# Altium PCB Pulse flashlight.PcbDoc
Units mil, origin at the board's own origin, x right, y up, seen from the top; angles counter-clockwise.
Board outline 1125 x 1005 mil, 2 copper layers (Top Layer, Bottom Layer); 13 components, 9 nets, 30 pads, 4 vias.
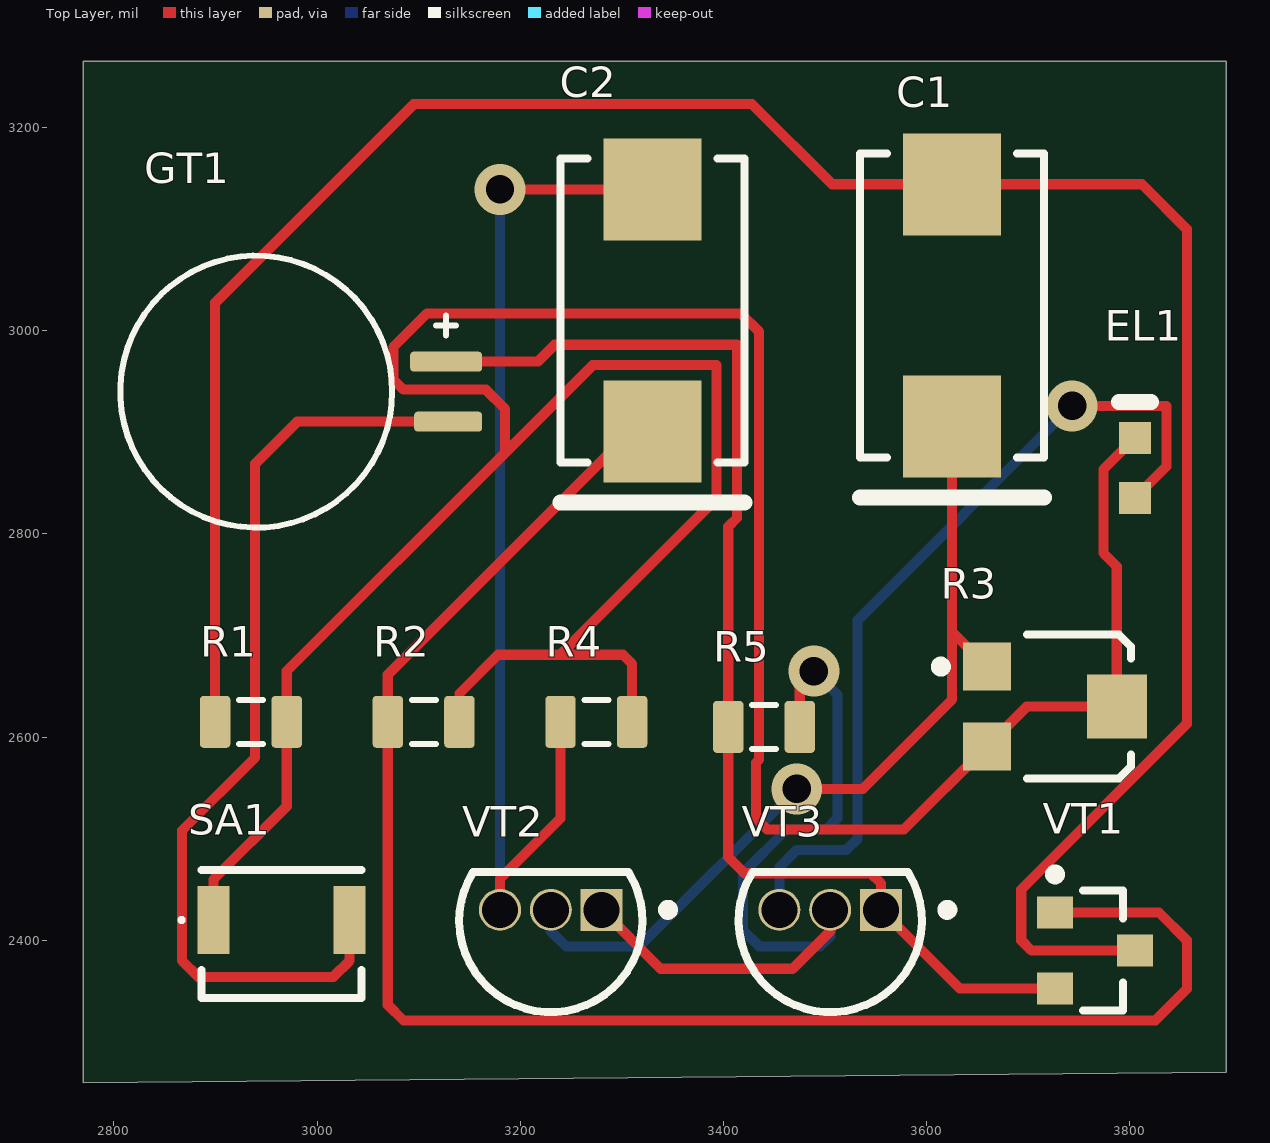
[diagram p0: Top Layer view]
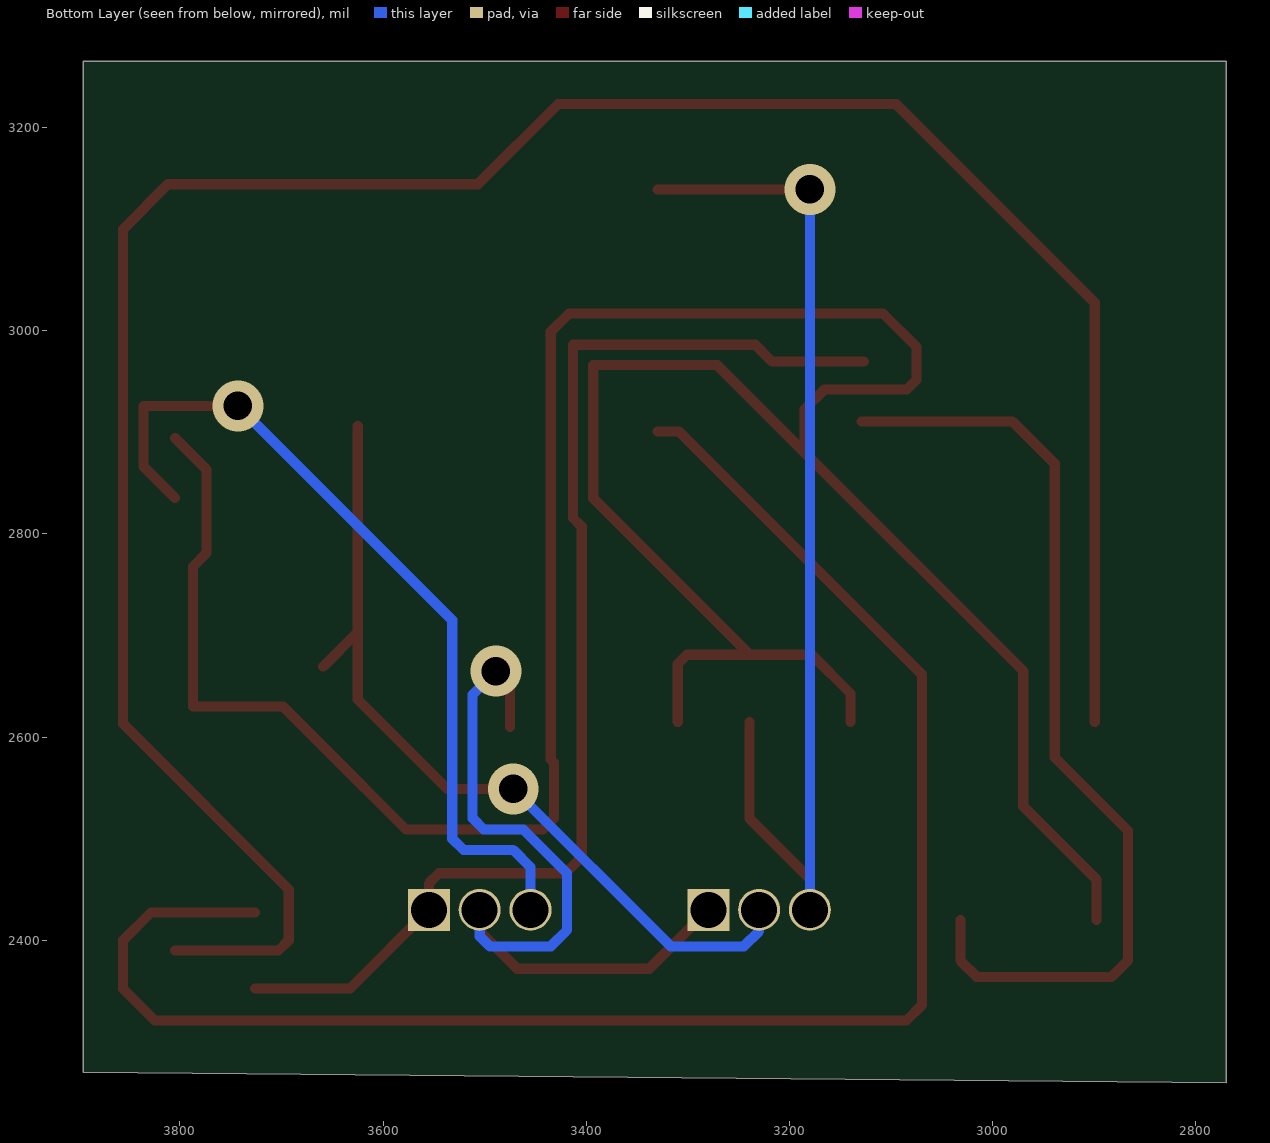
[diagram p1: Bottom Layer view, seen from below]
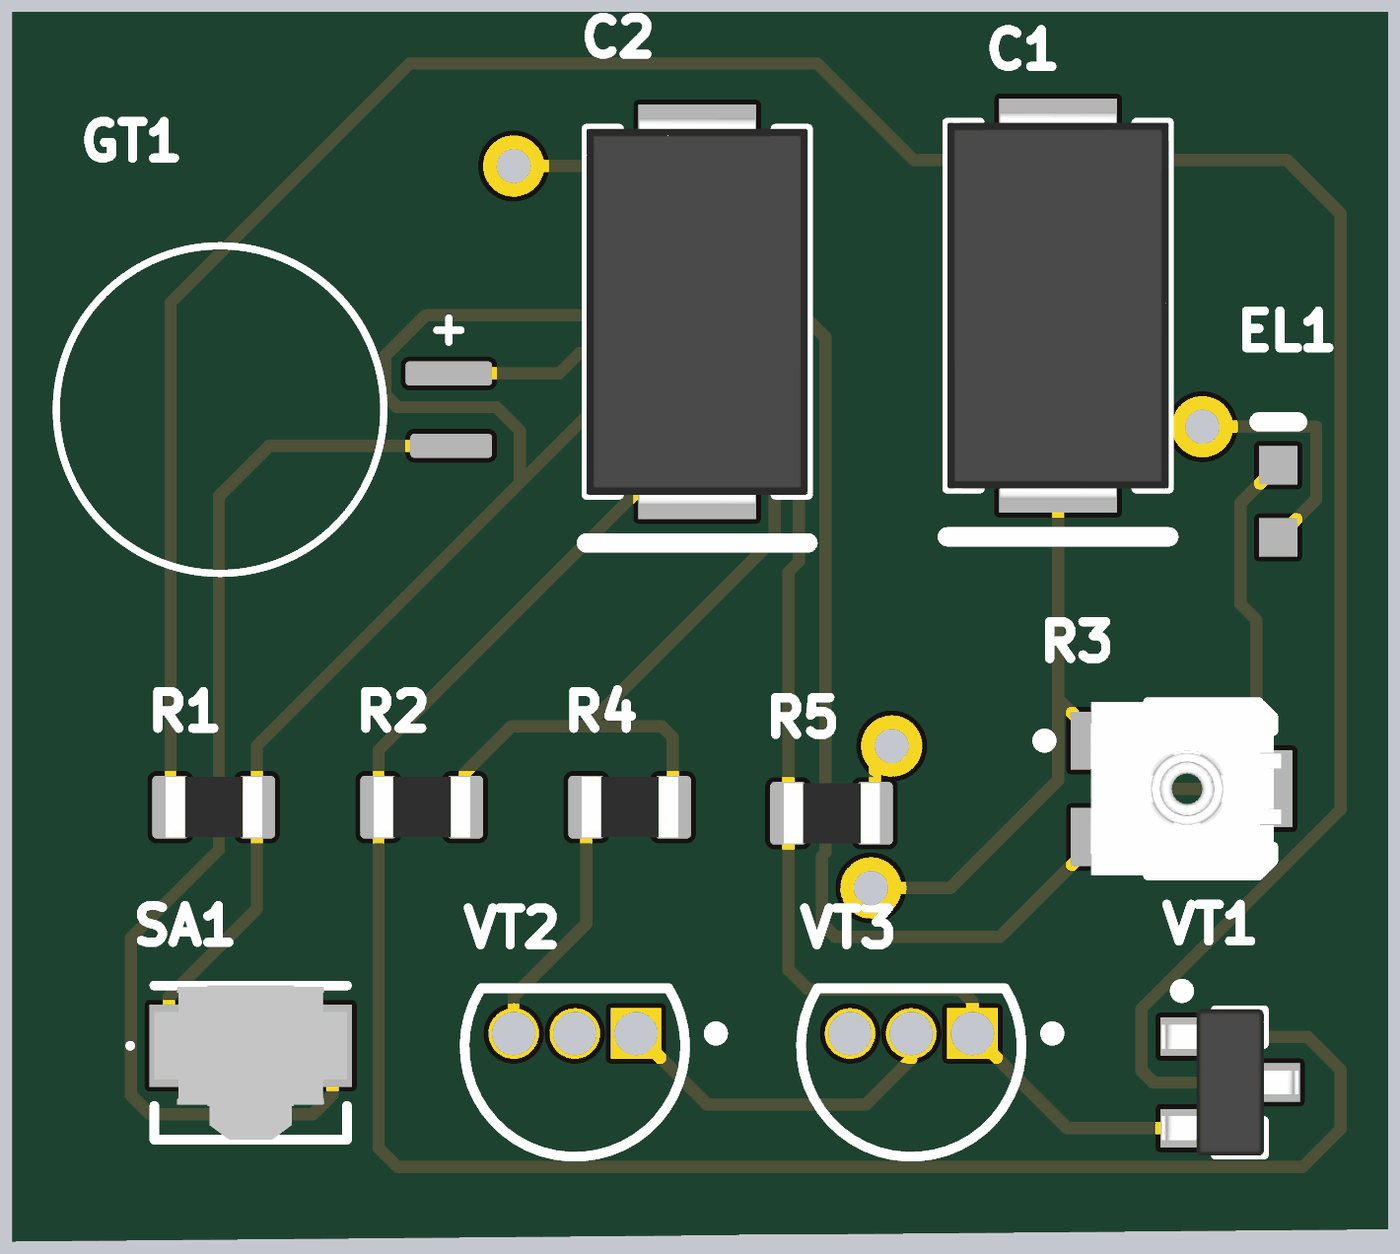
[diagram p2: 3D render of the assembled board from above, using the file's embedded part models]

## Layer stack, top to bottom
Top Solder: solder mask 0.4, Solder Resist, Dk 3.5
Top Layer: signal copper 1.4
Dielectric 1: dielectric 12.6, FR-4, Dk 4.8
Bottom Layer: signal copper 1.4
Bottom Solder: solder mask 0.4, Solder Resist, Dk 3.5

## Board outline
3895,2270 3895,3265 2770,3265 2770,2260

## Design rules (kind name [scope] priority, off if disabled: settings)
Clearance [All] p1: gap=10 ignorepadtopadclearanceinfootprint=FALSE except(0: Arc-Hole Track-Hole SMDPad-Hole THPad-Hole Via-Hole Fill-Hole Poly-Hole Region-Hole Text-Hole)
PolygonConnect [All] p1: connectstyle=Relief reliefconductorwidth=10 reliefentries=4 polygonreliefangle="90 Angle" airgapwidth=10
RoutingVias [All] p1: holewidth=28 width=50 viastyle="Through Hole" minholewidth=28 minwidth=50 maxholewidth=28 maxwidth=50
SolderMaskExpansion [All] p1: expansion=4 istentingtop=FALSE
Width [All] p1: maxlimit=10 minlimit=10 preferedwidth=10
30 further rules are at their usual default settings.

## Components (designator, comment, footprint, x,y, rotation, side; value= is the part's Value field where it differs from the comment)
C1 "293D107X9010D2TE3" VISH-7343-31_N 3625,3025 r90 top value="50mk x 6B"
C2 "293D107X9010D2TE3" VISH-7343-31_N 3330,3020 r90 top value="10mk x 6B"
EL1 "HSMG-C190" AVAG-HSMX-C190_V 3805,2865 r90 top (schematic designator HL1)
GT1 "4.5B" SEIK-MS621FE-FL11E-2_V 2940,2940 r0 top
R1 "1KR5J" RESC0805(2012)_L 2935,2615 r0 top value=1.5k
R2 "1KR5J" RESC0805(2012)_L 3105,2615 r0 top value=20k
R3 "TC33X-2-103E" BOUR-TC33X-2_V 3730,2630 r0 top value=150K
R4 "1KR5J" RESC0805(2012)_L 3275,2615 r0 top value=1.5k
R5 "1KR5J" RESC0805(2012)_L 3440,2610 r0 top value=160k
SA1 "B3U-3000P" OMRON-B3U-3000P_V 2965,2420 r0 top
VT1 "МП141А" ONSC-SOT-23-3-318-08_V 3765.63,2390 r0 top
VT2 "МП141А" UNIC-TO-92-3 3230,2430 r0 top
VT3 "МП26Б" UNIC-TO-92-3 3505,2430 r0 top

## Footprints (in the part's own frame and the unit in brackets; to place one, negate y for a bottom-side part, rotate by r counter-clockwise, add the part's x,y. Pads: shape width x height; smd on the part's side, far side on the other; paste and mask are expansions set on the pad)
AVAG-HSMX-C190_V [mm] "SMD, 2-Leads, Body 1.6x0.8mm, Height 0.9mm"
  rect 0.8x0.8 smd: 1(-0.75,0) 2(0.75,0)
  silkscreen extent 1.65,-0.4 1.65,0.4, body extent -0.8,-0.4 0.8,0.4, height 0.9
BOUR-TC33X-2_V [mm] "SMD, 3-Leads, Body 3.8x3.6mm"
  rect 1.2x1.2 smd: 1(-1.8,1) 3(-1.8,-1)
  rect 1.5x1.6 smd: 2(1.45,0)
  silkscreen extent -3.07,-1.8 1.8,1.8, body extent -2,-1.8 1.96,1.8, height 1.15
OMRON-B3U-3000P_V [mm] "SMD, 2-Leads, Body 4x3.2mm"
  rect 0.8x1.7 smd: 1(-1.7,0) 2(1.7,0)
  silkscreen extent -2.55,-1.95 2,1.25, body extent -2,-1.95 2,1.25, height 1.2
ONSC-SOT-23-3-318-08_V [mm] "SOT23, 3-Leads, Body 3.04x1.4mm, Pitch 0.95mm"
  rect 0.9x0.8 smd: 1(-1,0.95) 2(-1,-0.95) 3(1,0)
  silkscreen extent -1.12,-1.5 0.7,2.02, body extent -1.42,-1.52 1.42,1.52, height 1.11
RESC0805(2012)_L [mm] "Chip Resistor, Body 2.0x1.3mm, IPC High Density"
  rrect25% 0.76x1.3 smd: 1(-0.9,0) 2(0.89,0)
  silkscreen extent -0.3,-0.55 0.3,0.55, body extent -1,-0.62 1,0.63, height 0.6
SEIK-MS621FE-FL11E-2_V [mm] "SMD, 2-Leads, Diameter 6.8mm"
  rrect35% 1.8x0.5 smd: 1(4.75,0.75)
  rrect35% 1.7x0.5 smd: 2(4.8,-0.75)
  silkscreen extent -3.4,-3.4 5,3.4, body extent -3.4,-3.4 4.35,3.4, height 2.7
UNIC-TO-92-3 [mm] "TO-92, 3-Leads, Dia 4.58mm, Pitch 1.27mm"
  rect 1.05x1.05 hole 0.9: 1(1.27,0)
  round 1.05 hole 0.9: 2(0,0) 3(-1.27,0)
  silkscreen extent -2.29,-2.56 3.05,0.94, body extent -2.3,-2.6 2.3,0.94, height 7.23
VISH-7343-31_N [mm] "Molded Capacitor, 2-Leads, Body 7.6x4.6mm, IPC Medium Density"
  rect 2.55x2.45 smd: 1(-3.025,0) 2(3.025,0)
  silkscreen extent -4.8,-2.3 3.8,2.3, body extent -4.02,-2.3 4.02,2.3, height 3.1

## Part data
C1 C2: library part CMP-001-00020-7, "Solid Tantalum Chip Capacitor, 100 uF, +/- 10%, 10 V, -55 to 125 degC, 2917 (7343 Metric), RoHS, Tape and Reel", Capacitor Type=Tantalum, Case/Package=7343-31, Manufacturer="Vishay Semiconductor", Max Operating Temperature=125°C, Min Operating Temperature=-55°C, Package Description="2-Pin Surface Mount Device, Body 7.3 x 4.3 mm", Tolerance=10%, Voltage Rating=10V, Datasheet URL=http://www.vishay.com/docs/40002/293d.pdf, Datasheet Version=Aug-16, Manufacturer URL=http://www.vishay.com/, Mounting Technology=SM, Package Reference=7343-31, Packaging=TapeandReel, RoHS Compliant=Unknown
EL1: library part CMP-007-00013-2, "LED Uni-Color Green, 52 mW, 20 mA, -40 to 85 degC, 2-Pin SMD, RoHS, Tape and Reel", Case/Package=0603, Colour=Green, Forward Current=20mA, Forward Voltage=2.2V, Manufacturer=Avago, Max Operating Temperature=85°C, Min Operating Temperature=-40°C, Package Description="2-Pin Surface Mount Device, Body 1.6 x 0.8 mm, Height 0.9 mm", Package Quantity=4000, Package Reference=HSMX-C190, Power=52mW, Datasheet URL=http://docs.avagotech.com/docs/AV02-0551EN, Datasheet Version=Mar-12, Illumination Colour=Green, Lens Style=Diffused, Luminous Intensity=15mcd, Manufacturer URL=http://www.avagotech.com/, Mounting Technology=SM, Nominal Vf=2.2V, Packaging=TapeandReel, Pins=2, RoHS Compliant=True, Viewing Angle=170degrees
GT1: library part CMP-00029-00000-1, "MS Lihium Rechargeable Battery, 3 V, -20 to 60 degC, Tray", Mounting Technology=WithLeads, Pins=2, RoHS Compliant=NotApplicable
R1 R2 R4 R5: library part CMP-009-00076-2, "1K 0.125W 5% 0805 (2012 Metric)  SMD", Case/Package=0805, Power=125mW, Tolerance=5%, Mounting Technology=SMT, Pins=2
R3: library part CMP-009-00060-2, "Trimming Potentiometer, 10000 Ohm, -40 to 100 degC, 3-Pin SMD, RoHS, Tape and Reel", Case/Package=TC33X-2, Manufacturer=Bourns, Max Operating Temperature=120°C, Min Operating Temperature=-40°C, Package Description="3-Pin Surface Mount Device, Body 3.8 x 3.6 mm", Package Quantity=2500, Power=100mW, Resistance=1k, Tolerance=25%, Composition=Potentiometer, Datasheet URL=http://www.bourns.com/docs/Product-Datasheets/TC33.pdf, Datasheet Version=Aug-16, Manufacturer URL=http://www.bourns.com/, Mounting Technology=SM, Package Reference=TC33X-2, Packaging=TapeandReel, RoHS Compliant=True
SA1: library part CMP-011-00005-2, "Tactile Switch, SPST-NO, 0.05 A, 12 V, -25 to 70 degC, 2-Pin SMD, RoHS, Tape and Reel", Contact Current Rating=50mA, IP Rating=IP40, Manufacturer="Omron Electronic Components", Max Contact Resistance=100mohm, Max Operating Temperature=70°C, Max Voltage Rating (DC)=12V, Min Operating Temperature=-25°C, Operating Force=162gf, Package Description="2-Pin Surface Mount Device, Body 4 x 3.2 mm", Package Quantity=4000, Case/Package=B3U-3000P, Contact Material=Silver, Current Rating=50mA, Datasheet URL=https://www.omron.com/ecb/products/pdf/en-b3u.pdf, Datasheet Version=Jan-15, Manufacturer URL=http://www.omron.com/, Max Current Rating=50mA, Mounting Technology=SM, Package Reference=B3U-3000P, Packaging=TapeandReel, RoHS Compliant=True, Throw Configuration=SPST, Voltage Rating=12V, Voltage Rating (DC)=12V
VT1: library part CMP-013-00003-3, "PNP General-Purpose Amplifier, 40 V, 0.2 A, -55 to 150 degC, 3-Pin SOT23, RoHS, Tape and Reel", Case/Package=TO-236-3, Frequency=250MHz, Manufacturer="ON Semiconductor", Max Operating Temperature=150°C, Min Operating Temperature=-55°C, Package Description="3-Pin Small Outline Transistor, Body 2.9 x 1.3 mm, Pitch 0.95 mm", Package Quantity=3000, Package Reference="SOT-23 (318-08)", Power=225mW, Datasheet URL=http://www.onsemi.cn/pub_link/Collateral/MMBT3906LT1-D.PDF, Datasheet Version="Rev. 12, 10/2016", Elements=1, hFE Min=80, Mounting Technology=SM, Packaging=TapeandReel, Pins=3, RoHS Compliant=True, Vce Max=400mV
VT2 VT3: library part CMP-013-00004-3, "Low Voltage High Current Small Signal PNP Transistor, 20 V, 700 mA, 3-Pin TO-92, RoHS", Case/Package=TO-92-3, Manufacturer=Unisonic, Package Description="3-Pin Through Hole Device, Dia 4.58 mm, Pitch 1.27 mm", Datasheet URL=http://media.nkcelectronics.com/datasheet/s8550.pdf, Datasheet Version="Rev. E, 06/2014", Mounting Technology=TH, Package Reference=TO-92-3, RoHS Compliant=Unknown

## Via types
v1: diameter 50, hole 28, Top Layer to Bottom Layer, 4 vias

## Nets (pads, with @x,y where several pads share a name; then routed paths per layer and width w, separated by ;. In a path a pad name is that pad's centre, name@x,y a point inside that pad or via, vN(x,y) a via of type N, cw(c..) or ccw(c..) an arc to the next point about the centre after c; other vN are vias at no path point)
NetC1_1: C1.1 R3.1 VT2.2 | length 840
  Top Layer w10: v1(3472,2549) 3537,2549 3625,2637 3625,2703.5 ; C1.1 3625,2703.5 ; R3.1 3625,2703.5
  Bottom Layer w10: VT2.2 3230,2409 3245,2394 3317,2394 v1(3472,2549)
NetC1_2: C1.2 R1.1 VT1.3 | length 2384.6
  Top Layer w10: R1.1 2899.57,3027.57 3095,3223 3428,3223 3506.91,3144.09 C1.2 3811.91,3144.09 3856,3100 3856,2613 3693,2450 3693,2400 3703,2390 VT1.3
NetC2_1: C2.1 R2.1 VT1.1 | length 1679.4
  Top Layer w10: C2.1 3309,2900.91 3069.57,2661.47 R2.1 3069.57,2336.43 3085,2321 3825,2321 3856,2352 3856,2400 3828.6,2427.4 VT1.1
NetC2_2: C2.2 R4.1 VT2.3 | length 1068.8
  Top Layer w10: VT2.3 3180,2460.43 3239.57,2520 R4.1 ; v1(3180,3139.09) C2.2
  Bottom Layer w10: VT2.3 v1(3180,3139.09)
NetGT1_1: GT1.1 R5.1 VT1.2 VT3.1 | length 1191.3
  Top Layer w10: GT1.1 3217.28,2969.53 3233.86,2986.1 3413.23,2986.1 3413.23,2815.71 3404.57,2807.04 R5.1 3404.57,2482.03 3420.6,2466 3545,2466 3555,2456 VT3.1 3632.4,2352.6 VT1.2
NetGT1_2: GT1.2 SA1.2 | length 944.2
  Top Layer w10: SA1.2 3031.93,2380 3015.93,2364 2883,2364 2867,2380 2867,2508 2939,2580 2939,2869 2980.47,2910.47 GT1.2
NetHL1_1: EL1.1 VT3.3 | length 840.3
  Top Layer w10: v1(3743,2926) 3836,2926 3836,2866.48 EL1.1
  Bottom Layer w10: VT3.3 3455,2471.86 3472.14,2489 3521,2489 3532,2500 3532,2715 v1(3743,2926)
NetHL1_2: EL1.2 R1.2 R2.2 R3.2 R3.3 R4.2 SA1.1 | length 3197
  Top Layer w10: SA1.1 2898.07,2460 2970.04,2531.97 R1.2 2970.04,2665.04 3185,2880 ; R2.2 3140.04,2643 3178.04,2681 3239.23,2681 ; R4.2 3310.04,2671.96 3301,2681 3239.23,2681 ; EL1.2 3774,2863.53 3774,2781.09 3787.09,2768 R3.2 3698.5,2630 R3.3 3577.5,2509 3443,2509 3432,2520 3432,2575 3435,2578 3435,2999 3417,3017 3108,3017 3075,2984 3075,2952 3085,2942 3166,2942 3185,2923 3185,2880 ; 3185,2880 3271.1,2966.1 3393.23,2966.1 3393.23,2835 3239.23,2681
NetR5_2: R5.2 VT2.1 VT3.2 | length 794.8
  Top Layer w10: VT2.1 3338,2372 3468,2372 3505,2409 VT3.2 ; R5.2 3475.04,2651.04 v1(3489,2665)
  Bottom Layer w10: v1(3489,2665) 3512,2642 3512,2520 3501,2509 3462,2509 3419,2466 3419,2410 3435,2394 3495,2394 3505,2404 VT3.2